# Altium PCB Hardware_Tutorial.PcbDoc
Units mm, origin at the board's own origin, x right, y up, seen from the top; angles counter-clockwise.
Board outline 60 x 60 mm, 2 copper layers (Top Layer, Bottom Layer); 31 components, 41 nets, 142 pads, 38 vias.
Unrouted connection lines stored in the file: 26.
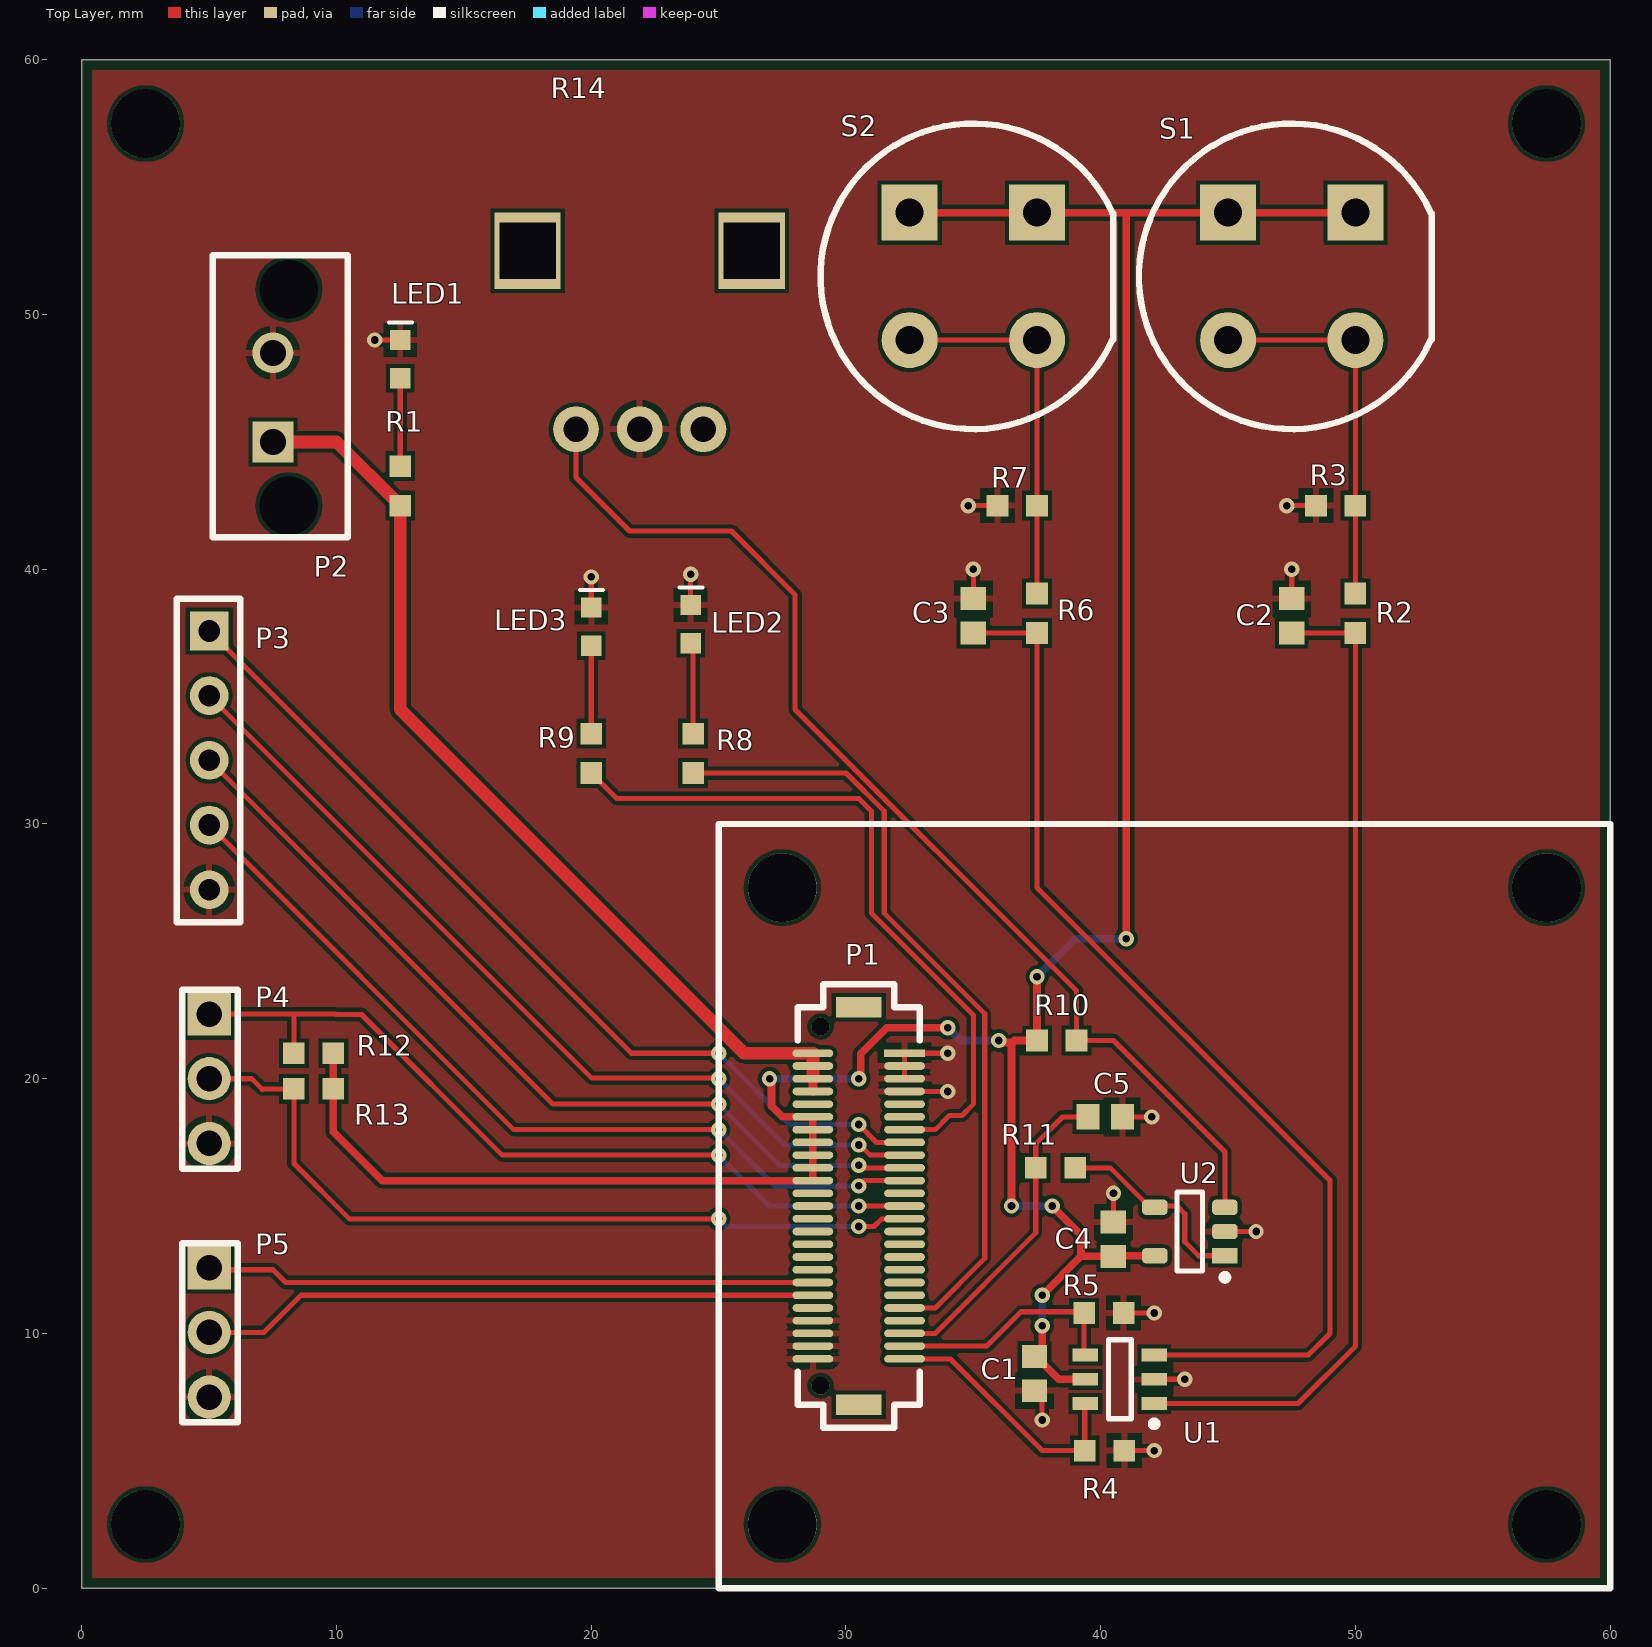
[diagram p0: Top Layer view]
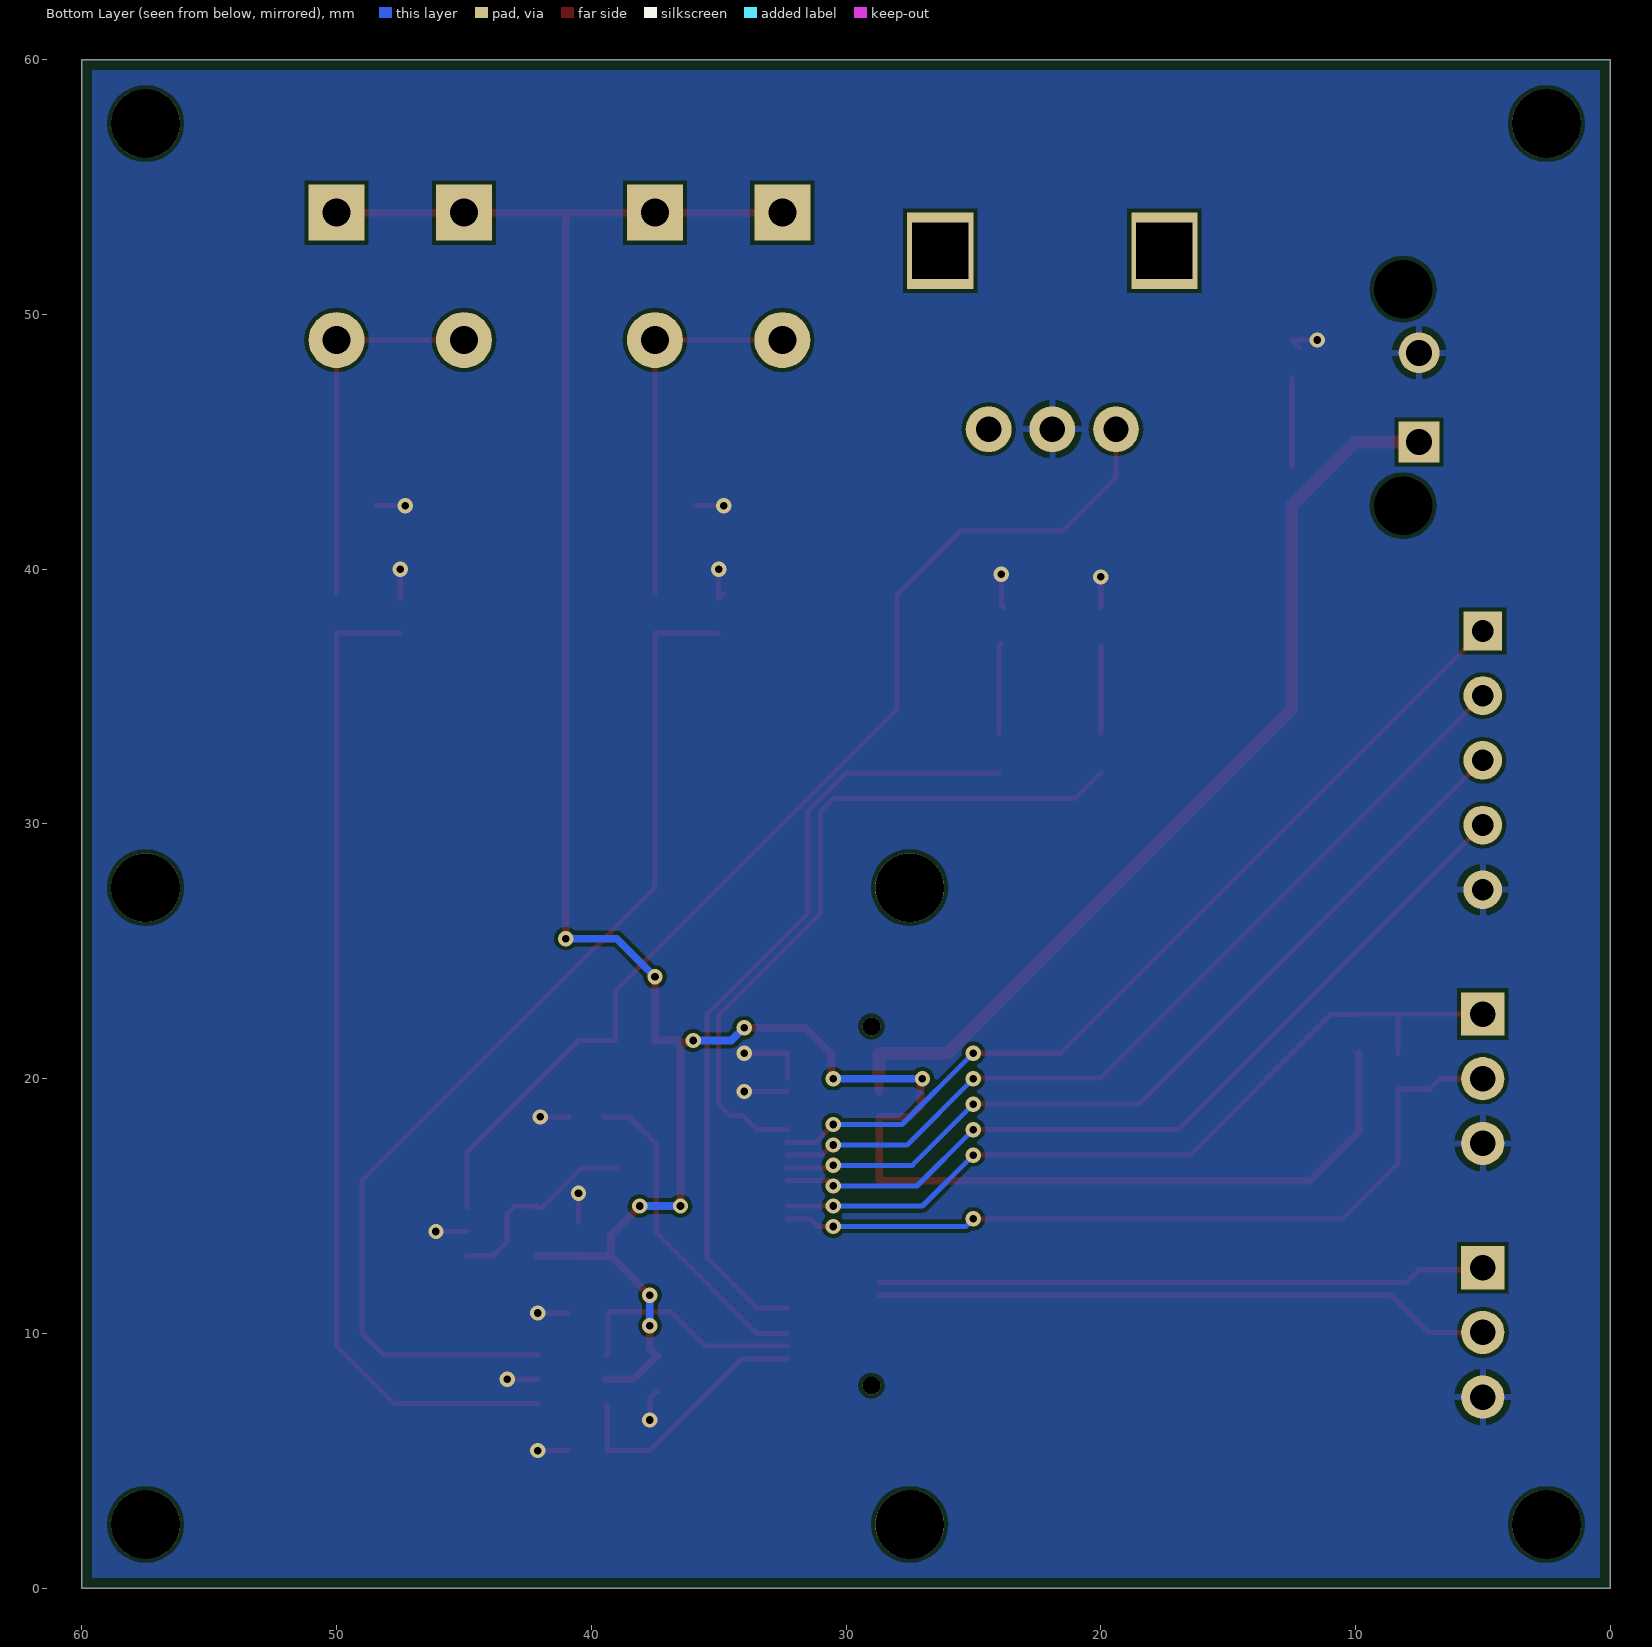
[diagram p1: Bottom Layer view, seen from below]
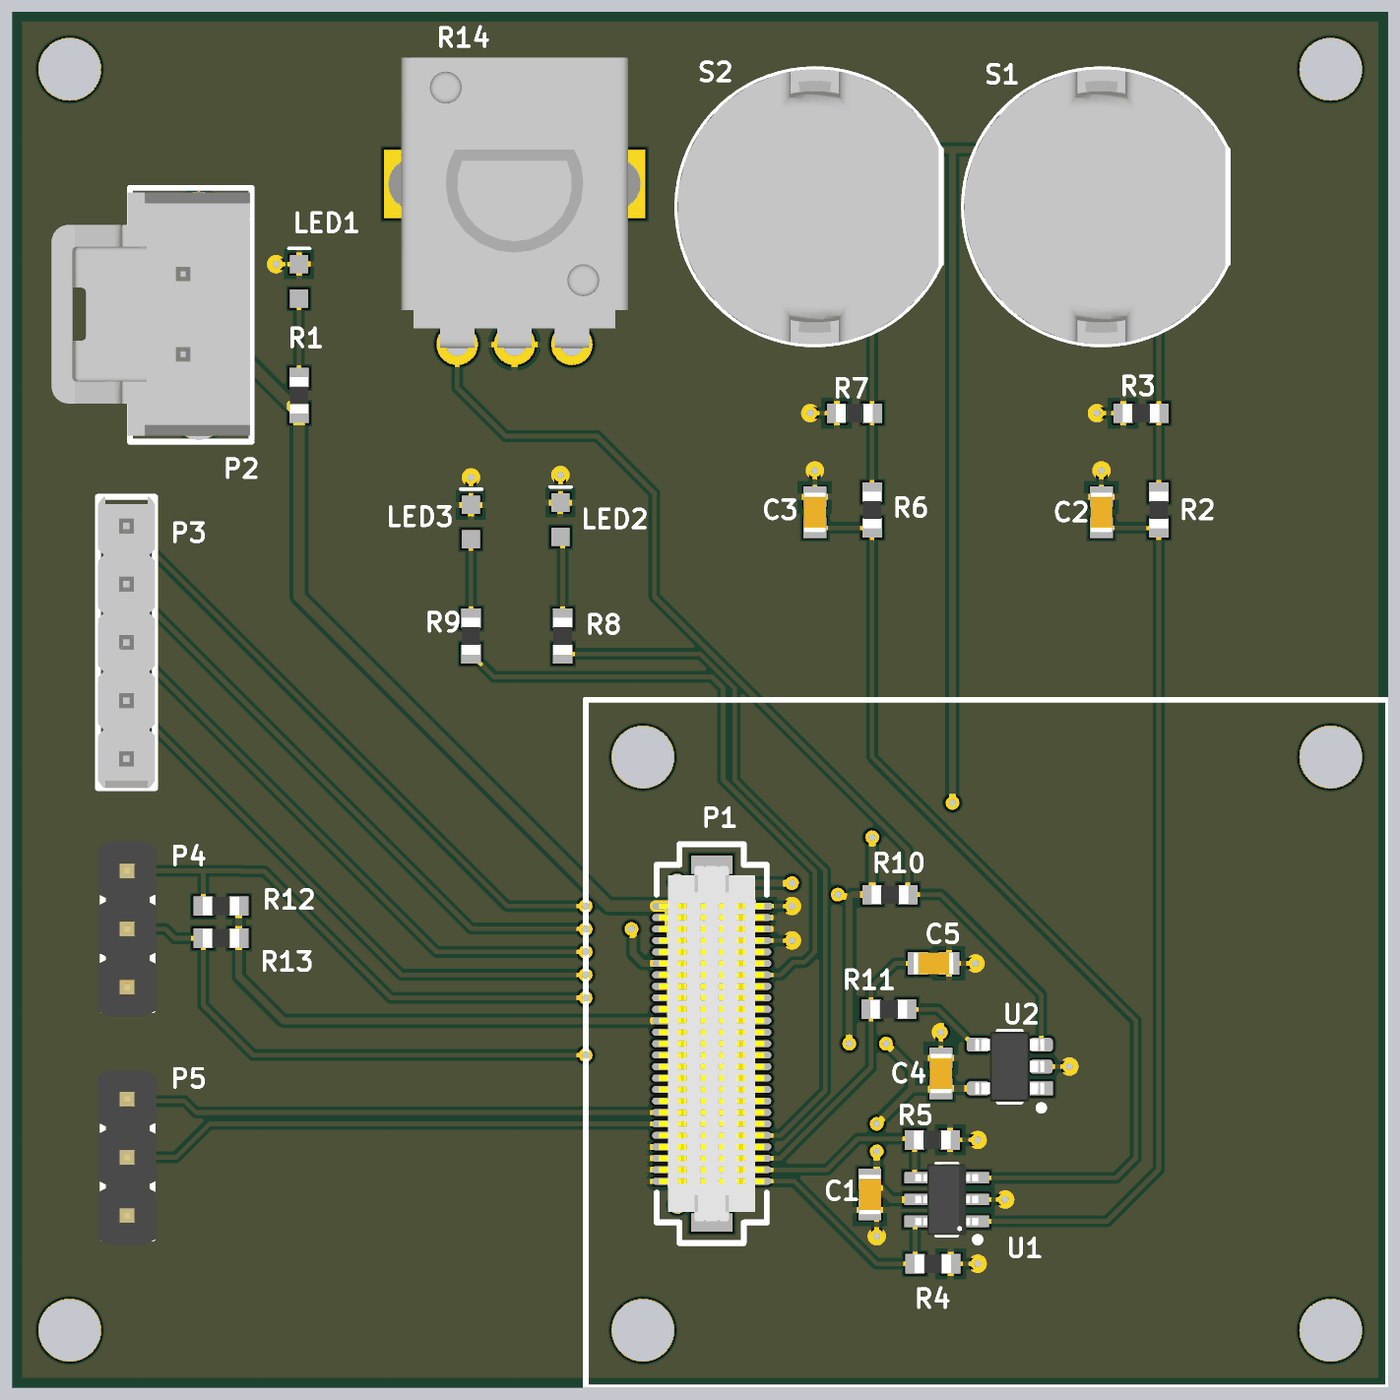
[diagram p2: 3D render of the assembled board from above, using the file's embedded part models]

## Layer stack, top to bottom
Top Solder: solder mask 0.0102, Solder Resist, Dk 3.5
Top Layer: signal copper 0.0356
Dielectric 1: dielectric 0.32, FR-4, Dk 4.8
Bottom Layer: signal copper 0.0356
Bottom Solder: solder mask 0.0102, Solder Resist, Dk 3.5

## Board outline
0,0 0,60 60,60 60,0

## Design rules (kind name [scope] priority, off if disabled: settings)
BoardOutlineClearance [All] p1: gap=0.406 ignorepadtopadclearanceinfootprint=FALSE
Clearance [All] p1: gap=0.152 ignorepadtopadclearanceinfootprint=FALSE except(0: Arc-Hole Track-Hole SMDPad-Hole THPad-Hole Via-Hole Fill-Hole Poly-Hole Region-Hole Text-Hole)
ComponentClearance ComponentClearance_ControllerBoard [InComponent('P1') vs Identifier = 'Controller_Board'] p1: gap=0 collisioncheckmode=3 verticalgap=0 showdistances=FALSE
ComponentClearance ComponentClearance_Standoffs [Identifier = 'Standoff' vs Identifier = 'Controller_Board'] p2: gap=0 collisioncheckmode=3 verticalgap=0 showdistances=FALSE
ComponentClearance [All] p3: gap=0.254 collisioncheckmode=3 verticalgap=0.254 showdistances=FALSE
HoleSize [All] p1: absolutevalues=TRUE maxlimit=6.3 minlimit=0.3 maxpercent=80.000 minpercent=20.000
MinimumAnnularRing [All] p1: minimumring=0.152
MinimumSolderMaskSliver [All] p1: minsoldermaskwidth=0.3
PolygonConnect [IsPad] p1: connectstyle=Relief reliefconductorwidth=0.254 reliefentries=4 polygonreliefangle="90 Angle" airgapwidth=0.254
PolygonConnect PolygonConnect_NoThermal [Not(IsPad)] p2: connectstyle=Direct reliefconductorwidth=0.254 reliefentries=4 polygonreliefangle="90 Angle" airgapwidth=0.254
RoutingVias [All] p1: holewidth=0.3 width=0.6 viastyle="Through Hole" minholewidth=0.3 minwidth=0.6 maxholewidth=0.711 maxwidth=1.27
SilkToSolderMaskClearance [IsPad] p1: minsilkscreentomaskgap=0.178 clearancetoexposedcopper=TRUE
SolderMaskExpansion [All] p1: expansion=0.102
Width [All] p1: maxlimit=2.54 minlimit=0.154 preferedwidth=0.2
26 further rules are at their usual default settings.

## Components (designator, comment, footprint, x,y, rotation, side; value= is the part's Value field where it differs from the comment)
C1 "CAP CER 0.1UF 50V 10% X7R 0603" "CAP, 0603" 37.4,8.425 r270 top
C2 "CAP CER 4.7UF 25V 10% X5R 0603" "CAP, 0603" 47.5,38.175 r90 top
C3 "CAP CER 4.7UF 25V 10% X5R 0603" "CAP, 0603" 35,38.175 r90 top
C4 "CAP CER 0.1UF 50V 10% X7R 0603" "CAP, 0603" 40.5,13.7 r90 top
C5 "CAP CER 0.1UF 50V 10% X7R 0603" "CAP, 0603" 40.175,18.5 r0 top
LED1 "LED GREEN CLEAR 2V 0603" LED_0603 12.51,47.55 r90 top
LED2 "LED GREEN CLEAR 2V 0603" LED_0603 23.91,37.15 r90 top
LED3 "LED BLUE CLEAR 2.8V 0603" LED_0603 20.01,37.05 r90 top
P1 "CONN 50POS Bergstak Plug 0.02\"" "CONN, BERGSTAK 50 POS PLUG" 30.5,15 r0 top locked
P2 "CONN 2POS ULTRA-FIT 0.138\"" "CONN, 2POS ULTRA-FIT" 7.5,45 r90 top
P3 "5POS 0.1" "CONN, 5POS HEADR 0.1\"" 5,37.58 r270 top
P4 "CONN 3POS HEADR MALE 0.1\"" "CONN 3POS 0.100\" Header, 1 ROW" 5,22.54 r270 top
P5 "CONN 3POS HEADR MALE 0.1\"" "CONN 3POS 0.100\" Header, 1 ROW" 5,12.58 r270 top
R1 "RES 4.7K OHM 1% 1/10W 0603" "RES, 0603" 12.5,43.275 r90 top
R2 "RES 10K OHM 1% 1/10W 0603" "RES, 0603" 50,38.275 r90 top
R3 "RES 10K OHM 1% 1/10W 0603" "RES, 0603" 49.225,42.5 r180 top
R4 "RES 10K OHM 1% 1/10W 0603" "RES, 0603" 40.15,5.4 r180 top
R5 "RES 10K OHM 1% 1/10W 0603" "RES, 0603" 40.125,10.8 r0 top
R6 "RES 10K OHM 1% 1/10W 0603" "RES, 0603" 37.5,38.275 r90 top
R7 "RES 10K OHM 1% 1/10W 0603" "RES, 0603" 36.725,42.5 r180 top
R8 "RES 220 OHM 1% 1/10W 0603" "RES, 0603" 24,32.775 r90 top
R9 "68R" "RES, 0603" 20,32.775 r90 top
R10 "RES 10K OHM 1% 1/10W 0603" "RES, 0603" 38.275,21.5 r0 top
R11 "RES 100 OHM 1% 1/10W 0603" "RES, 0603" 38.225,16.5 r180 top
R12 "RES 4.7K OHM 1% 1/10W 0603" "RES, 0603" 9.1,21 r180 top
R13 "RES 4.7K OHM 1% 1/10W 0603" "RES, 0603" 9.1,19.6 r180 top
R14 "POT 10K OHM LINEAR THROUGH HOLE" "POT 10K OHM LINEAR THROUGH HOLE" 21.9,45.5 r0 top
S1 "SPST" "SW SPST D6 SERIES GREEN" 50,54 r180 top
S2 "SPST" "SW SPST D6 SERIES BLUE" 37.5,54 r180 top
U1 "IC INVERTER SCHMITT 2CH 6-TSSOP" "IC INVERTER SCHMITT 2CH 6-TSSOP" 40.75,8.2 r180 top
U2 "IC OP AMP GEN PURPOSE RR 10MHZ SOT-23-5" "IC OP AMP GP RR 10MHZ SOT-23-5" 43.5,14 r180 top

## Footprints (in the part's own frame and the unit in brackets; to place one, negate y for a bottom-side part, rotate by r counter-clockwise, add the part's x,y. Pads: shape width x height; smd on the part's side, far side on the other; paste and mask are expansions set on the pad)
"CAP, 0603" [mm] "Chip Capacitor, 2-Leads, Body 1.60x0.81mm, IPC Medium Density"
  rect 0.9x1 smd mask+0.076: 1(-0.675,0) 2(0.675,0)
  body extent -0.87,-0.48 0.87,0.48, height 0.9
"CONN 3POS 0.100\" Header, 1 ROW" [mm] "Connector, 3 position 0.1\" (2.54mm) Through Hole Generic Header"
  rect 1.7x1.7 hole 1: 1(0,0)
  round 1.7 hole 1: 2(2.54,0) 3(5.08,0)
  silkscreen extent -0.95,-1.06 6.08,1.12, body extent -1.27,-1.27 6.35,1.27, height 8.87
"CONN, 2POS ULTRA-FIT" [mm] "2 Positions Header, Shrouded Connector 0.138\" (3.50mm) Through Hole Gold"
  rect 1.6x1.6 hole 1.02: 1(0,0)
  round 1.6 hole 1.02: 2(3.5,0)
  round 1.6 hole 2.3: ""(-2.5,-0.63) ""(6,-0.63)
  silkscreen extent -3.74,-2.93 7.33,2.37, body extent -3.48,-2.87 7.12,5.79, height 13.85
"CONN, 5POS HEADR 0.1\"" [mil]
  rect 60x60 hole 33.46: 1(0,0)
  round 60 hole 33.46: 2(100,0) 3(200,0) 4(300,0) 5(400,0)
  silkscreen extent -50,-50 450,48, body extent -50,-50 450,48, height 335
"CONN, BERGSTAK 50 POS PLUG" [mm] "Bergstak 50 Position Plug"
  rect 1.6x0.3 smd: 1(1.8,6)
  oval 1.6x0.3 smd: 2(1.8,5.5) 3(1.8,5) 4(1.8,4.5) 5(1.8,4) 6(1.8,3.5) 7(1.8,3) 8(1.8,2.5) 9(1.8,2) 10(1.8,1.5) 11(1.8,1) 12(1.8,0.5) 13(1.8,0) 14(1.8,-0.5) 15(1.8,-1) 16(1.8,-1.5) 17(1.8,-2) 18(1.8,-2.5) 19(1.8,-3) 20(1.8,-3.5) 21(1.8,-4) 22(1.8,-4.5) 23(1.8,-5) 24(1.8,-5.5) 25(1.8,-6) 26(-1.8,-6) 27(-1.8,-5.5) 28(-1.8,-5) 29(-1.8,-4.5) 30(-1.8,-4) 31(-1.8,-3.5) 32(-1.8,-3) 33(-1.8,-2.5) 34(-1.8,-2) 35(-1.8,-1.5) 36(-1.8,-1) 37(-1.8,-0.5) 38(-1.8,0) 39(-1.8,0.5) 40(-1.8,1) 41(-1.8,1.5) 42(-1.8,2) 43(-1.8,2.5) 44(-1.8,3) 45(-1.8,3.5) 46(-1.8,4) 47(-1.8,4.5) 48(-1.8,5) 49(-1.8,5.5) 50(-1.8,6)
  round 0.7 hole 0.7: ""(-1.5,-7.05) ""(-1.5,7.05)
  rect 1.8x0.8 smd: ""(0,-7.8) ""(0,7.8)
  silkscreen extent -2.4,-8.7 2.4,8.7, body extent -2.3,-7.75 2.3,7.75, height 4.2
"IC INVERTER SCHMITT 2CH 6-TSSOP" [mm] "Inverter IC 2 Channel Schmitt Trigger 6-TSSOP"
  rect 1x0.5 smd: 1(-1.35,0.95) 2(-1.35,0) 3(-1.35,-0.95) 4(1.35,-0.95) 5(1.35,0) 6(1.35,0.95)
  silkscreen extent -1.48,-1.55 0.45,1.87, body extent -1.38,-1.55 1.38,1.55, height 1.1
"IC OP AMP GP RR 10MHZ SOT-23-5" [mm] "SOT23, 5-Leads, Body 2.90x2.80mm, Pitch 0.95mm, IPC Medium Density"
  rect 1x0.6 smd: 1(-1.375,0.95)
  rrect50% 1x0.6 smd: 2(-1.375,0) 3(-1.375,-0.95) 4(1.375,-0.95) 5(1.375,0.95)
  silkscreen extent -1.5,-1.55 0.5,1.92, body extent -1.5,-1.53 1.5,1.53, height 1.45
LED_0603 [mm]
  rect 0.8x0.8 smd: 1(-0.05,0.01) 2(1.45,0.01)
  silkscreen extent 2.13,-0.46 2.13,0.45, body extent -0.09,-0.39 1.51,0.41, height 0.8
"POT 10K OHM LINEAR THROUGH HOLE" [mm] "10k Ohm 1 Gang Linear Through Hole, Snap In Potentiometer None 1 Turn Carbon 0.05W, 1/20W PC Pins, Board Locks"
  round 1.8 hole 1: 1(-2.5,0) 2(0,0) 3(2.5,0)
  rect 2.6x3 hole 2.2 square: 4(-4.4,7) 4(4.4,7)
  body extent -5.7,-0.15 5.7,12.5, height 14.5
"RES, 0603" [mm] "Chip Resistor, 2-Leads, Body 1.60x0.80mm, IPC Medium Density"
  rect 0.85x0.85 smd: 1(-0.775,0) 2(0.775,0)
  body extent -0.8,-0.4 0.8,0.4, height 0.55
"SW SPST D6 SERIES BLUE" [mm]
  rect 2.2x2.2 hole 1.1: 1(0,0) 1(5,0)
  round 2.2 hole 1.1: 2(0,5) 2(5,5)
  silkscreen extent -3,-3.5 8.5,8.5, body extent -2.9,-3.5 8.5,8.5, height 6.17
"SW SPST D6 SERIES GREEN" [mm]
  rect 2.2x2.2 hole 1.1: 1(0,0) 1(5,0)
  round 2.2 hole 1.1: 2(0,5) 2(5,5)
  silkscreen extent -3,-3.5 8.5,8.5, body extent -2.9,-3.5 8.5,8.5, height 6.17

## Part data
C1 C4 C5: "0.10µF ±10% 50V Ceramic Capacitor X7R 0603 (1608 Metric)", Capacitance=0.1µF, Manufacturer 1="AVX Corporation", Manufacturer Part Number 1=06035C104KAT2A, Operating Temperature="-55°C ~ 125°C", Package / Case="0603 (1608 Metric)", Ratings=-, Supplier Part Number 1=478-5052-1-ND, Temperature Coefficient=X7R, Tolerance=±10%, Voltage=50V, ComponentLink1Description=http://datasheets.avx.com/X7RDielectric.pdf, ComponentLink1URL=http://datasheets.avx.com/X7RDielectric.pdf, Height - Seated (Max)=-, Lead Spacing=-, Lead Style=-, Mounting Type="Surface Mount, MLCC", Packaging="Cut Tape (CT)", Part Status=Active, Size / Dimension="0.063\" L x 0.032\" W (1.60mm x 0.81mm)", Supplier 1=Digi-Key, Thickness (Max)="0.035\" (0.90mm)"
C2 C3: "4.7µF ±10% 25V Ceramic Capacitor X5R 0603 (1608 Metric)", Capacitance=4.7µF, Manufacturer 1="Murata Electronics North America", Manufacturer Part Number 1=GRM188R61E475KE11D, Operating Temperature="-55°C ~ 85°C", Package / Case="0603 (1608 Metric)", Ratings=-, Supplier Part Number 1=490-7203-1-ND, Temperature Coefficient=X5R, Tolerance=±10%, Voltage=25V, ComponentLink1Description=http://www.murata.com/~/media/webrenewal/support/library/catalog/products/capacitor/mlcc/c02e.ashx, ComponentLink1URL=http://www.murata.com/~/media/webrenewal/support/library/catalog/products/capacitor/mlcc/c02e.ashx, Height - Seated (Max)=-, Lead Spacing=-, Lead Style=-, Mounting Type="Surface Mount, MLCC", Packaging="Cut Tape (CT)", Part Status=Active, Size / Dimension="0.063\" L x 0.031\" W (1.60mm x 0.80mm)", Supplier 1=Digi-Key, Thickness (Max)="0.031\" (0.80mm)"
LED1 LED2: "Green 572nm LED Indication - Discrete 2V 0603 (1608 Metric)", Color=Green, Current - Test=20mA, Lens Color=Colorless, Manufacturer="Wurth Electronics Inc.", Manufacturer Part Number=150060VS75000, Millicandela Rating=40mcd, Package / Case="0603 (1608 Metric)", Supplier Device Package=0603, Supplier Part Number 1=732-4980-1-ND, Voltage - Forward (Vf) (Typ)=2V, Category=Optoelectronics, ComponentLink1Description=http://katalog.we-online.de/led/datasheet/150060VS75000.pdf, ComponentLink1URL=http://katalog.we-online.de/led/datasheet/150060VS75000.pdf, Features=-, Height (Max)=0.80mm, Lens Style/Size="Rectangle with Flat Top, 1.10mm x 0.70mm", Lens Transparency=Clear, Mounting Type="Surface Mount", Packaging="Cut Tape (CT)", Part Status=Active, Pricing 1="1=0.21, 100=0.1617, 500=0.13964 (CAD)", RoHS="RoHS Compliant", Size / Dimension="1.60mm L x 0.80mm W", Stock 1=9408, Supplier 1=Digi-Key, Viewing Angle=140°, Wavelength - Dominant=570nm, Wavelength - Peak=572nm
LED3: "Blue 470nm LED Indication - Discrete 2.8V 0603 (1608 Metric)", Color=Blue, Current - Test=5mA, Lens Color=Colorless, Manufacturer 1="Lite-On Inc.", Manufacturer Part Number 1=LTST-C193TBKT-5A, Millicandela Rating=15mcd, Package / Case="0603 (1608 Metric)", Supplier Device Package="Chip LED", Supplier Part Number 1=160-1827-1-ND, Voltage - Forward (Vf) (Typ)=2.8V, ComponentLink1Description=http://optoelectronics.liteon.com/upload/download/DS22-2004-060/P_100_LTST-C193TBKT-5A.pdf, ComponentLink1URL=http://optoelectronics.liteon.com/upload/download/DS22-2004-060/P_100_LTST-C193TBKT-5A.pdf, Height (Max)=0.45mm, Lens Style/Size="Rectangle with Flat Top, 1.15mm x 0.80mm", Lens Transparency=Clear, Mounting Type="Surface Mount", Packaging="Cut Tape (CT)", Part Status=Active, Size / Dimension="1.60mm L x 0.80mm W", Supplier 1=Digi-Key, Viewing Angle=130°, Wavelength - Dominant=470nm, Wavelength - Peak=468nm
P1: "50 Position Connector Plug, Outer Shroud Contacts Surface Mount Gold", Manufacturer 1="Amphenol FCI", Manufacturer Part Number 1=10132797-055100LF, Supplier Part Number 1=609-5226-1-ND, ComponentLink1Description=http://portal.fciconnect.com/Comergent//fci/drawing/10132797.pdf, ComponentLink1URL=http://portal.fciconnect.com/Comergent//fci/drawing/10132797.pdf, Connector Type="Plug, Outer Shroud Contacts", Contact Finish=Gold, Contact Finish Thickness="1µin (0.025µm)", Height Above Board="0.169\" (4.30mm)", Mated Stacking Heights=5mm, Mounting Type="Surface Mount", Number of Positions=50, Number of Rows=2, Packaging="Cut Tape (CT)", Part Status=Active, Pitch="0.020\" (0.50mm)", Series="BergStak Plug", Supplier 1=Digi-Key
P2: "Connector Header Through Hole 2 position 0.138\" (3.50mm)", Color=Black, Manufacturer=Molex, Manufacturer Part Number=1722871102, Supplier Part Number 1=WM11701-ND, ComponentLink1Description=http://www.molex.com/pdm_docs/sd/1722861302_sd.pdf, ComponentLink1URL=http://www.molex.com/pdm_docs/sd/1722861302_sd.pdf, Connector Type="Male Pin", Contact Plating=Tin, Fastening Type=Latch, Mount="Through Hole", Number of Positions=2, Number of Rows=1, Packaging=Tray, Pitch=0.138inch, Pricing 1="1 = 0.78000, 10 = 0.68800, 100 = 0.59380, 500 = 0.48582, 1000 = 0.43184, 5000 = 0.37786, 10000 = 0.35897 (USD)", RoHS=Yes, Series=UltraFit, Stock 1=2743, Supplier 1=Digi-Key, Termination=Solder
P3: library part "CONN 5POS HEADR MALE 0.1in", "5 Positions Header, Breakaway Connector 0.100\" (2.54mm) Through Hole Tin", Colour=Black, Contact Resistance=20mR, Manufacturer 1=Molex, Manufacturer Part Number 1=0022284050, Max Operating Temperature=75°C, Max Voltage Rating (AC)=250V, Min Operating Temperature=0°C, Supplier Part Number 1=WM50014-05-ND, ComponentLink1Description=https://datasheet.ciiva.com/6814/022284363-sd-6814049.pdf, ComponentLink1URL=https://datasheet.ciiva.com/6814/022284363-sd-6814049.pdf, ComponentLink2Description=https://datasheet.ciiva.com/14804/179390022284050-pcb-headers-14804361.pdf, ComponentLink2URL=https://datasheet.ciiva.com/14804/179390022284050-pcb-headers-14804361.pdf, ComponentLink3Description=https://datasheet.ciiva.com/15217/getdatasheetpartid-256138-15217709.pdf, ComponentLink3URL=https://datasheet.ciiva.com/15217/getdatasheetpartid-256138-15217709.pdf, Connector Type="Male Pin", Contact Material=Bronze,Brass, Contact Mating Length=0.24inch, Contact Plating=Nickel,Tin, Depth=2.49mm, Description 1="Conn Unshrouded Header HDR 5 POS 2.54mm Solder ST Thru-Hole KK® Bag", Gender=Male, Housing Colour=Black, Housing Material=Nylon, Length=12.7mm, Max Voltage Rating (DC)=250V, Mount="Through Hole", Number of Contacts=5, Number of Positions=5, Number of Rows=1, Orientation=Straight, Packaging=Bulk, Pitch=2.54mm, Pricing 1="1=0.22, 10=0.21, 25=0.1796, 50=0.157, 100=0.1459, 250=0.129, 500=0.1234 (USD)", Stock 1=3161, Supplier 1=Digi-Key, Termination=Solder
P4 P5: "3 Positions Header Connector 0.100\" (2.54mm) Through Hole Gold", Current Rating=3A, Insulation Color=Black, Manufacturer 1="Wurth Electronics Inc.", Manufacturer Part Number 1=61300311121, Material Flammability Rating="UL94 V-0", Operating Temperature="-40°C ~ 125°C", Supplier Part Number 1=732-5316-ND, Voltage=250V, ComponentLink1Description=http://katalog.we-online.de/em/datasheet/6130xx11121.pdf, ComponentLink1URL=http://katalog.we-online.de/em/datasheet/6130xx11121.pdf, Connector Type=Header, Contact Finish - Mating=Gold, Contact Finish - Post=-, Contact Finish Thickness - Mating=-, Contact Finish Thickness - Post=-, Contact Length - Mating="0.236\" (6.00mm)", Contact Length - Post="0.118\" (3.00mm)", Contact Material="Copper Alloy", Contact Shape=Square, Contact Type="Male Pin", Fastening Type=-, Ingress Protection=-, Insulation Height="0.100\" (2.54mm)", Insulation Material="Polybutylene Terephthalate (PBT)", Mated Stacking Heights=-, Mounting Type="Through Hole", Number of Positions=3, Number of Positions Loaded=All, Number of Rows=1, Overall Contact Length="0.454\" (11.54mm)", Packaging=Bulk, Part Status=Active, Pitch - Mating="0.100\" (2.54mm)", Row Spacing - Mating=-, Shrouding=Unshrouded, Style="Board to Board or Cable", Supplier 1=Digi-Key, Termination=Solder
R1 R12 R13: "4.7k Ohm ±1% 0.1W, 1/10W Chip Resistor 0603 (1608 Metric) Moisture Resistant Thick Film", Manufacturer 1=Yageo, Manufacturer Part Number 1=RC0603FR-074K7L, Operating Temperature="-55°C ~ 155°C", Package / Case="0603 (1608 Metric)", Power (Watts)=1/10W, Resistance (Ohms)=4.7k, Supplier Device Package=0603, Supplier Part Number 1=311-4.70KHRCT-ND, Temperature Coefficient=±100ppm/°C, Tolerance=±1%, Category=Resistors, ComponentLink1Description=http://www.yageo.com/documents/recent/PYu-RC_Group_51_RoHS_L_7.pdf, ComponentLink1URL=http://www.yageo.com/documents/recent/PYu-RC_Group_51_RoHS_L_7.pdf, Composition="Thick Film", Description 1="RES SMD 4.7K OHM 1% 1/10W 0603", Failure Rate=-, Features="Moisture Resistant", Height - Seated (Max)="0.022\" (0.55mm)", Packaging="Cut Tape (CT)", Part Status=Active, Pricing 1="1=0.16, 10=0.022, 100=0.0089, 1000=0.00402, 2500=0.00349 (CAD)", RoHS="RoHS Compliant", Size / Dimension="0.063\" L x 0.031\" W (1.60mm x 0.80mm)", Stock 1=3487566, Supplier 1=Digi-Key
R2 R3 R4 R5 R6 R7 R10: "RES SMD 10K OHM 1% 1/10W 0603", Manufacturer 1=Yageo, Manufacturer Part Number 1=RC0603FR-0710KL, Operating Temperature="-55°C ~ 155°C", Package / Case="0603 (1608 Metric)", Power=1/10W, Resistance=10k, Supplier Device Package=0603, Supplier Part Number 1=311-10.0KHRCT-ND, Temperature Coefficient=±100ppm/°C, Tolerance=±1%, ComponentLink1Description=http://www.yageo.com/documents/recent/PYu-RC_Group_51_RoHS_L_7.pdf, ComponentLink1URL=http://www.yageo.com/documents/recent/PYu-RC_Group_51_RoHS_L_7.pdf, Composition="Thick Film", Failure Rate=-, Height - Seated (Max)="0.022\" (0.55mm)", Packaging="Cut Tape (CT)", Part Status=Active, Size / Dimension="0.063\" L x 0.031\" W (1.60mm x 0.80mm)", Supplier 1=Digi-Key
R8: "220 Ohms ±1% 0.1W, 1/10W Chip Resistor 0603 (1608 Metric) Moisture Resistant Thick Film", Manufacturer=Yageo, Manufacturer Part Number=RC0603FR-07220RL, Operating Temperature="-55°C ~ 155°C", Package / Case="0603 (1608 Metric)", Power (Watts)=1/10W, Resistance=220, Supplier Device Package=0603, Supplier Part Number 1=311-220HRCT-ND, Temperature Coefficient=±100ppm/°C, Tolerance=±1%, Category=Resistors, ComponentLink1Description=http://www.yageo.com/documents/recent/PYu-RC_Group_51_RoHS_L_8.pdf, ComponentLink1URL=http://www.yageo.com/documents/recent/PYu-RC_Group_51_RoHS_L_8.pdf, Composition="Thick Film", Failure Rate=-, Features="Moisture Resistant", Height - Seated (Max)="0.022\" (0.55mm)", Packaging="Cut Tape (CT)", Part Status=Active, Pricing 1="1=0.15, 10=0.022, 100=0.0088, 1000=0.00392, 2500=0.0034 (CAD)", RoHS="RoHS Compliant", Size / Dimension="0.063\" L x 0.032\" W (1.60mm x 0.80mm)", Stock 1=1318812, Supplier 1=Digi-Key
R9: library part "RES 68 OHM 1% 1/10W 0603", "68 Ohm ±1% 0.1W, 1/10W Chip Resistor 0603 (1608 Metric) Moisture Resistant Thick Film", Manufacturer=Yageo, Manufacturer Part Number=RC0603FR-0768RL, Operating Temperature="-55°C ~ 155°C", Package / Case="0603 (1608 Metric)", Power (Watts)="0.1W, 1/10W", Resistance (Ohms)=68, Supplier Device Package=0603, Supplier Part Number 1=311-68.0HRCT-ND, Temperature Coefficient=±100ppm/°C, Tolerance=±1%, Category=Resistors, ComponentLink1Description=http://www.yageo.com/documents/recent/PYu-RC_Group_51_RoHS_L_7.pdf, ComponentLink1URL=http://www.yageo.com/documents/recent/PYu-RC_Group_51_RoHS_L_7.pdf, Composition="Thick Film", Failure Rate=-, Features="Moisture Resistant", Height - Seated (Max)="0.022\" (0.55mm)", Packaging="Cut Tape (CT)", Part Status=Active, Pricing 1="1=0.15, 10=0.023, 100=0.0093, 1000=0.00415, 2500=0.0036 (CAD)", RoHS="RoHS Compliant", Size / Dimension="0.063\" L x 0.031\" W (1.60mm x 0.80mm)", Stock 1=500164, Supplier 1=Digi-Key
R11: "100 Ohm ±1% 0.1W, 1/10W Chip Resistor 0603 (1608 Metric) Moisture Resistant Thick Film", Manufacturer 1=Yageo, Manufacturer Part Number 1=RC0603FR-07100RL, Operating Temperature="-55°C ~ 155°C", Package / Case="0603 (1608 Metric)", Power=1/10W, Resistance=100, Supplier Device Package=0603, Supplier Part Number 1=311-100HRCT-ND, Temperature Coefficient=±100ppm/°C, Tolerance=±1%, ComponentLink1Description=http://www.yageo.com/documents/recent/PYu-RC_Group_51_RoHS_L_7.pdf, ComponentLink1URL=http://www.yageo.com/documents/recent/PYu-RC_Group_51_RoHS_L_7.pdf, Composition="Thick Film", Failure Rate=-, Height - Seated (Max)="0.022\" (0.55mm)", Packaging="Cut Tape (CT)", Part Status=Active, Size / Dimension="0.063\" L x 0.031\" W (1.60mm x 0.80mm)", Supplier 1=Digi-Key
R14: "10k Ohm 1 Gang Linear Through Hole, Snap In Potentiometer None 1 Turn Carbon 0.05W, 1/20W PC Pins, Board Locks", Manufacturer 1=Bourns, Manufacturer Part Number 1=PTV09A-4015F-B103, Max Operating Temperature=50°C, Max Power Dissipation=50mW, Min Operating Temperature=-10°C, Package Quantity=100, Resistance=10kR, Supplier Part Number 1=PTV09A-4015F-B103-ND, Tolerance=20%, Actuator Diameter=0.236inch, Actuator Length=0.591inch, ComponentLink1Description=https://datasheet.ciiva.com/8701/ptv09-8701798.pdf?src-supplier=Avnet, ComponentLink1URL=https://datasheet.ciiva.com/8701/ptv09-8701798.pdf?src-supplier=Avnet, ComponentLink2Description=https://datasheet.ciiva.com/4991/ptv09-4991849.pdf?src-supplier=Mouser, ComponentLink2URL=https://datasheet.ciiva.com/4991/ptv09-4991849.pdf?src-supplier=Mouser, ComponentLink3Description=https://datasheet.ciiva.com/6249/ptv09-6249515.pdf?src-supplier=Digi-Key, ComponentLink3URL=https://datasheet.ciiva.com/6249/ptv09-6249515.pdf?src-supplier=Digi-Key, Composition=Carbon, Depth=12.5mm, Length=11.4mm, Military Standard=Not, Mount="Through Hole", Number of Gangs=1, Number of Turns=1, Packaging=Bulk, Power Rating=50mW, Pricing 1="1=0.83000, 10=0.74400, 25=0.67200, 50=0.64800, 100=0.61200, 300=0.58800, 500=0.55200, 1000=0.45600, 5000=0.37200 (USD)", Radiation Hardening=No, REACH SVHC="No SVHC", RoHS=Yes, Stock 1=744, Supplier 1=Digi-Key, Taper=Linear, Termination=PCB, Type=Potentiometer
S1: library part "SW SPST-NO 0.1A 32V D6 Series Green", "Pushbutton Switch SPST-NO Keyswitch Through Hole D6 Series Green", Color - Actuator/Cap=Green, Current Rating="100mA (DC)", Illumination Type, Color=-, Manufacturer=C&K, Manufacturer Part Number="D6R50 F1 LFS", Operating Temperature="-20°C ~ 85°C", Supplier Part Number 1=401-1976-ND, Voltage Rating - DC=32V, Actuator Type="Round, Button", Category=Switches, Circuit=SPST-NO, ComponentLink1Description=http://www.ckswitches.com/media/1341/d6.pdf, ComponentLink1URL=http://www.ckswitches.com/media/1341/d6.pdf, Electrical Life="250,000 Cycles", Features="Tactile Feedback", Illumination Voltage (Nominal)=-, Ingress Protection=-, Mechanical Life=-, Mounting Type="Through Hole", Packaging=Bulk, Panel Cutout Dimensions=-, Part Status=Active, Pricing 1="1=1.73, 10=1.607, 25=1.5308, 50=1.454, 100=1.4158, 250=1.37756, 500=1.30102, 1000=1.22448, 5000=1.03316 (CAD)", RoHS="RoHS Compliant", Stock 1=3742, Supplier 1=Digi-Key, Switch Function=Off-Mom, Termination Style="PC Pin", Type=Keyswitch, Voltage Rating - AC=-
S2: library part "SW SPST-NO 0.1A 32V D6 Series Blue", "Pushbutton Switch SPST-NO Keyswitch Through Hole D6 Series Blue", Color - Actuator/Cap=Blue, Current Rating="100mA (DC)", Illumination Type, Color=-, Manufacturer=C&K, Manufacturer Part Number="D6R60 F1 LFS", Operating Temperature="-20°C ~ 85°C", Supplier Part Number 1=401-1977-ND, Voltage Rating - DC=32V, Actuator Type="Round, Button", Category=Switches, Circuit=SPST-NO, ComponentLink1Description=http://www.ckswitches.com/media/1341/d6.pdf, ComponentLink1URL=http://www.ckswitches.com/media/1341/d6.pdf, Electrical Life="250,000 Cycles", Features="Tactile Feedback", Illumination Voltage (Nominal)=-, Ingress Protection=-, Mechanical Life=-, Mounting Type="Through Hole", Packaging=Bulk, Panel Cutout Dimensions=-, Part Status=Active, Pricing 1="1=1.73, 10=1.607, 25=1.5308, 50=1.454, 100=1.4158, 250=1.37756, 500=1.30102, 1000=1.22448, 5000=1.03316 (CAD)", RoHS="RoHS Compliant", Stock 1=3385, Supplier 1=Digi-Key, Switch Function=Off-Mom, Termination Style="PC Pin", Type=Keyswitch, Voltage Rating - AC=-
U1: "Inverter IC 2 Channel Schmitt Trigger 6-TSSOP", Case/Package=TSSOP, High Level Output Current=32mA, Manufacturer 1="NXP Semiconductors", Manufacturer Part Number 1=74LVC2G14GW-Q100H, Max Operating Temperature=125°C, Max Supply Voltage=5.5V, Min Operating Temperature=-40°C, Min Supply Voltage=1.65V, Package Quantity=3000, Quiescent Current=40uA, Supplier Part Number 1=1727-2072-1-ND, ComponentLink1Description=https://assets.nexperia.com/documents/data-sheet/74LVC2G14_Q100.pdf?src-supplier=Digi-Key, ComponentLink1URL=https://assets.nexperia.com/documents/data-sheet/74LVC2G14_Q100.pdf?src-supplier=Digi-Key, ComponentLink2Description=http://www.nxp.com/documents/data_sheet/74LVC2G14_Q100.pdf?src-supplier=Digi-Key, ComponentLink2URL=http://www.nxp.com/documents/data_sheet/74LVC2G14_Q100.pdf?src-supplier=Digi-Key, Contact Plating=Tin, Logic Function=Inverter, Low Level Output Current=32mA, Mount="Surface Mount", Number of Circuits=2, Number of Inputs=2, Packaging="Tape and Reel", Pricing 1="1=0.33000, 10=0.24300, 25=0.21240, 100=0.13740, 250=0.11372, 500=0.09100, 1000=0.06976 (USD)", Propagation Delay=4.3ns, RoHS=No, Stock 1=12418, Supplier 1=Digi-Key, Turn-On Delay Time=5.6ns
U2: "General Purpose Amplifier 1 Circuit Rail-to-Rail SOT-23-5", Current - Output / Channel=50mA, Current - Supply=400µA, Manufacturer 1="Texas Instruments", Manufacturer Part Number 1=TLV316QDBVRQ1, Operating Temperature="-40°C ~ 125°C", Package / Case="SC-74A, SOT-753", Supplier Device Package=SOT-23-5, Supplier Part Number 1=296-45323-1-ND, Voltage - Supply, Single/Dual (±)="1.8 V ~ 5.5 V, ±0.9 V ~ 2.75 V", -3db Bandwidth=-, Amplifier Type="General Purpose", Category="Integrated Circuits (ICs)", ComponentLink1Description=http://www.ti.com/lit/ds/symlink/tlv316-q1.pdf, ComponentLink1URL=http://www.ti.com/lit/ds/symlink/tlv316-q1.pdf, Description 1="IC OP AMP GP RR 10MHZ 5-SOT-23", Mounting Type="Surface Mount", Number of Circuits=1, Output Type=Rail-to-Rail, Packaging="Cut Tape (CT)", Part Status=Active, Pricing 1="1=1.33, 10=1.185, 100=0.9234, 500=0.76276, 1000=0.60218 (CAD)", RoHS="RoHS Compliant", Slew Rate="6 V/µs", Stock 1=1747, Supplier 1=Digi-Key

## Free pads (board coordinates)
  round 2.7 hole 2.7: ""(2.5,2.5) ""(2.5,57.5) ""(27.5,2.5) ""(27.5,27.5) ""(57.5,57.5) ""(57.5,2.5) ""(57.5,27.5)

## Via types
v1: diameter 0.6, hole 0.3, Top Layer to Bottom Layer, 38 vias

## Nets (pads, with @x,y where several pads share a name; then routed paths per layer and width w, separated by ;. In a path a pad name is that pad's centre, name@x,y a point inside that pad or via, vN(x,y) a via of type N, cw(c..) or ccw(c..) an arc to the next point about the centre after c; other vN are vias at no path point)
3V3: C1.1 C4.1 P1.40 P1.41 P1.42 P1.43 P1.44 P1.45 R10.1 R12.1 R13.1 S1.1 S2.1 U1.5 U2.5 | length 113.3
  Top Layer w0.3: R12.1 R13.1 9.875,17.925 11.8,16 P1.40 P1.41 P1.42 P1.43 P1.44 P1.45 27.6,18.5 27.5,18.5 27.077,18.923 27.077,19.923 v1(27,20) ; v1(30.5,20) 30.577,20.077 30.577,20.977 31.6,22 v1(34,22) ; S2.1@32.5,54 37.5,54 41,54 ; v1(36,21.5) 36.077,21.423 36.459,21.423 36.5,21.383 ; v1(36.5,15) 36.5,21.383 ; v1(37.5,24) R10.1 36.617,21.5 36.5,21.383 ; v1(37.7,10.3) 37.7,9.4 C1.1 37.45,9.1 38.35,8.2 U1.5 ; v1(37.7,11.5) 39.225,13.025 ; v1(38.1,15) 39.225,13.875 39.225,13.025 ; v1(41,25.5) 41,54 ; U2.5 40.525,13.05 C4.1 39.225,13.025 ; S1.1@50,54 45,54 41,54
  Bottom Layer w0.3: v1(27,20) v1(30.5,20) ; v1(34,22) 34.5,21.5 v1(36,21.5) ; v1(36.5,15) v1(38.1,15) ; v1(37.5,24) 39,25.5 v1(41,25.5) ; v1(37.7,10.3) v1@37.7,11.5
GND: C1.2 C2.2 C3.2 C4.2 C5.2 LED1.2 LED2.2 LED3.2 P1.1 P1.2 P1.3 P1.4 P1.26 P1.27 P1.28 P1.29 P2.2 P3.5 P4.3 P5.3 R3.2 R4.1 R5.2 R7.2 R14.2 U1.2 U2.2 | length 21.9
  Top Layer w0.2: P2.2 P2.2@7.7,48.7 ; v1(11.5,49) LED1.2 LED1.2@12.2,48.7 ; LED3.2 v1(20,39.7) ; LED2.2@23.8,38.5 LED2.2 v1(23.9,39.8) ; P1.4 v1(34,19.5) ; P1.3 P1.2 P1.1 v1(34,21) ; C3.2@34.8,39.05 C3.2 v1(35,40) ; v1(34.8,42.5) R7.2 ; C1.2@37.375,7.725 C1.2 37.7,7.45 v1(37.7,6.6) ; C4.2 v1(40.5,15.5) ; C5.2 v1(42,18.5) ; R5.2 v1(42.1,10.8) ; R4.1 v1(42.1,5.4) ; U1.2 v1(43.3,8.2) ; U2.2 v1(46.1,14) ; v1(47.3,42.5) R3.2 ; C2.2 v1(47.5,40)
NetC2_1: C2.1 R2.1 U1.1 | length 39.3
  Top Layer w0.2: U1.1 47.75,7.25 50,9.5 R2.1 C2.1
NetC3_1: C3.1 R6.1 U1.3 | length 42
  Top Layer w0.2: C3.1 R6.1 37.5,27.5 49,16 49,10 48.15,9.15 U1.3
NetLED1_1: LED1.1 R1.2 | length 3.5
  Top Layer w0.2: R1.2 LED1.1
NetLED2_1: LED2.1 R8.2 | length 3.6
  Top Layer w0.2: LED2.1 24,37 R8.2
NetLED3_1: LED3.1 R9.2 | length 3.4
  Top Layer w0.2: R9.2 LED3.1
NetR2_2: R2.2 R3.1 S1.2 | length 15
  Top Layer w0.2: S1.2@45,49 50,49 R3.1 R2.2
NetR6_2: R6.2 R7.1 S2.2 | length 15
  Top Layer w0.2: S2.2@32.5,49 37.5,49 R7.1 R6.2
NetR10_2: R10.2 R14.1 U2.3 | length 44.3
  Top Layer w0.2: R14.1 19.4,43.6 21.5,41.5 25.5,41.5 28,39 28,34.5 39.05,23.45 R10.2 40.5,21.5 44.875,17.125 U2.3
NetR11_1: R11.1 U2.1 U2.4 | length 8
  Top Layer w0.2: R11.1 40.375,16.5 41.925,14.95 U2.4 42.175,15 43,15 43.3,14.7 43.3,13.6 43.85,13.05 U2.1
PA0_AN0_Button_1_Input_1: P1.25 R4.2 U1.6 | length 10.4
  Top Layer w0.2: P1.25 34.1,9 37.7,5.4 R4.2 39.375,7.225 U1.6
PA1_AN1_Button_2_Input_1: P1.24 R5.1 U1.4 | length 9.3
  Top Layer w0.2: P1.24 35.514,9.5 36.866,10.852 39.298,10.852 R5.1 39.35,9.2 U1.4
PA2_AN2_POT_Input_1: C5.1 P1.23 R11.2 | length 12.8
  Top Layer w0.2: P1.23 33.5,10 37.45,13.95 R11.2 37.45,17.45 38.5,18.5 C5.1
PA3/AN3_1: P1.22
PA4_AN4_GLED_Output_1: P1.21 R8.1 | length 31.3
  Top Layer w0.2: R8.1 30,32 31.5,30.5 31.5,26.5 35.448,22.552 35.448,12.948 33.5,11 P1.21
PA5/AN5/SPI1_SCK_1: P1.20
PA6/AN6/SPI1_MISO_1: P1.19
PA7/AN7_1: P1.18
PA8_BLED_Output_1: P1.7 R9.1 | length 27.9
  Top Layer w0.2: R9.1 21,31 30.5,31 31,30.5 31,26.5 35,22.5 35,19 34.552,18.552 34.052,18.552 33.5,18 P1.7
PA9_1: P1.6
PA10_1: P1.5
PA15/LED_RED_1: P1.39
PB0/AN8_1: P1.17
PB1/AN9_1: P1.16
PB2_1: P1.15
PB3/LED_GREEN_1: P1.38
PB4/LED_BLUE_1: P1.37
PB5/LED_BLUE_1: P1.36
PB6/USART1_TX_1: P1.34
PB7/USART1_RX_1: P1.33
PB8/I2C1_SCL_1: P1.32 P5.1 | length 23.9
  Top Layer w0.2: P5.1 5.08,12.5 7.5,12.5 8,12 P1.32
PB9/I2C1_SDA_1: P1.31 P5.2 | length 24.3
  Top Layer w0.2: P5.2 7.14,10.04 8.6,11.5 P1.31
PB10/USART3_TX/I2C2_SCL_1: P1.14 P4.2 R13.2 | length 31.6
  Top Layer w0.2: P4.2 6.666,20 7.083,19.583 7.1,19.6 R13.2 8.325,16.675 10.5,14.5 v1(25,14.5) ; v1(30.5,14.2) 31.1,14.2 31.4,14.5 P1.14
  Bottom Layer w0.2: v1(25,14.5) 25.3,14.2 v1(30.5,14.2)
PB11/USART3_RX/I2C2_SDA_1: P1.13 P4.1 R12.2 | length 32.1
  Top Layer w0.2: P4.1@4.96,22.5 P4.1 8.4,22.54 ; R12.2 8.325,22.465 8.4,22.54 ; v1(25,17) 16.5,17 10.98,22.52 9.98,22.52 9.96,22.54 8.4,22.54 ; v1(30.5,15) P1.13@32.3,15
  Bottom Layer w0.2: v1(25,17) 27,15 v1(30.5,15)
PB12/SPI2_NSS_1: P1.11 P3.4 | length 33.3
  Top Layer w0.2: P3.4 16.96,18 v1(25,18) ; v1(30.5,15.792) 30.708,16 P1.11
  Bottom Layer w0.2: v1(25,18) 27.208,15.792 v1(30.5,15.792)
PB13/SPI2_SCK_1: P1.10 P3.3 | length 33.9
  Top Layer w0.2: P3.3 18.5,19 v1(25,19) ; v1@30.5,16.592 v1(30.5,16.6) 30.608,16.6 30.708,16.5 P1.10 P1.10@32.308,16.492
  Bottom Layer w0.2: v1(25,19) 27.4,16.6 v1(30.5,16.6)
PB14/SPI2_MISO_1: P1.9 P3.2 | length 34.8
  Top Layer w0.2: P3.2 20.02,20.02 24.98,20.02 v1(25,20) ; v1(30.5,17.4) 30.548,17.4 30.949,17 P1.9
  Bottom Layer w0.2: v1(25,20) 27.6,17.4 v1(30.5,17.4)
PB15/SPI2_MOSI_1: P1.8 P3.1 | length 35.6
  Top Layer w0.2: P3.1 21.58,21 v1(25,21) ; v1(30.5,18.2) 31.2,17.5 P1.8 P1.8@32.308,17.508
  Bottom Layer w0.2: v1(25,21) 27.8,18.2 v1(30.5,18.2)
PC13_1: P1.30
VBAT: P1.47 P1.48 P1.49 P1.50 P2.1 R1.1 | length 37.3
  Top Layer w0.35: P1.47 P1.48
  Top Layer w0.5: P2.1 10,45 R1.1 12.5,34.5 26,21 P1.50 P1.49 P1.48
pads on no net: P1. P1.12 P1.35 P1.46 P2. R14.3 R14.4

## Polygon pours and split planes (outlines as drawn)
GND on Bottom Layer (solid, pour order 32): 0,60 60,60 60,0 0,0
GND on Top Layer (solid, pour order 30): 0,60 60,60 60,0 0,0

## Silkscreen, mask and mechanical layers (free items; w line width, h text height)
Top Overlay:
  lines w0.254: 25,0 60,0 60,30 25,30 25,0